# Altium PCB sustentationAvecPC.PcbDoc
Units mm, origin at the board's own origin, x right, y up, seen from the top; angles counter-clockwise.
Board outline 160.02 x 100.33 mm, 3 copper layers (Top Layer, Mid-Layer 1, Bottom Layer); 26 components, 21 nets, 95 pads, 0 vias.
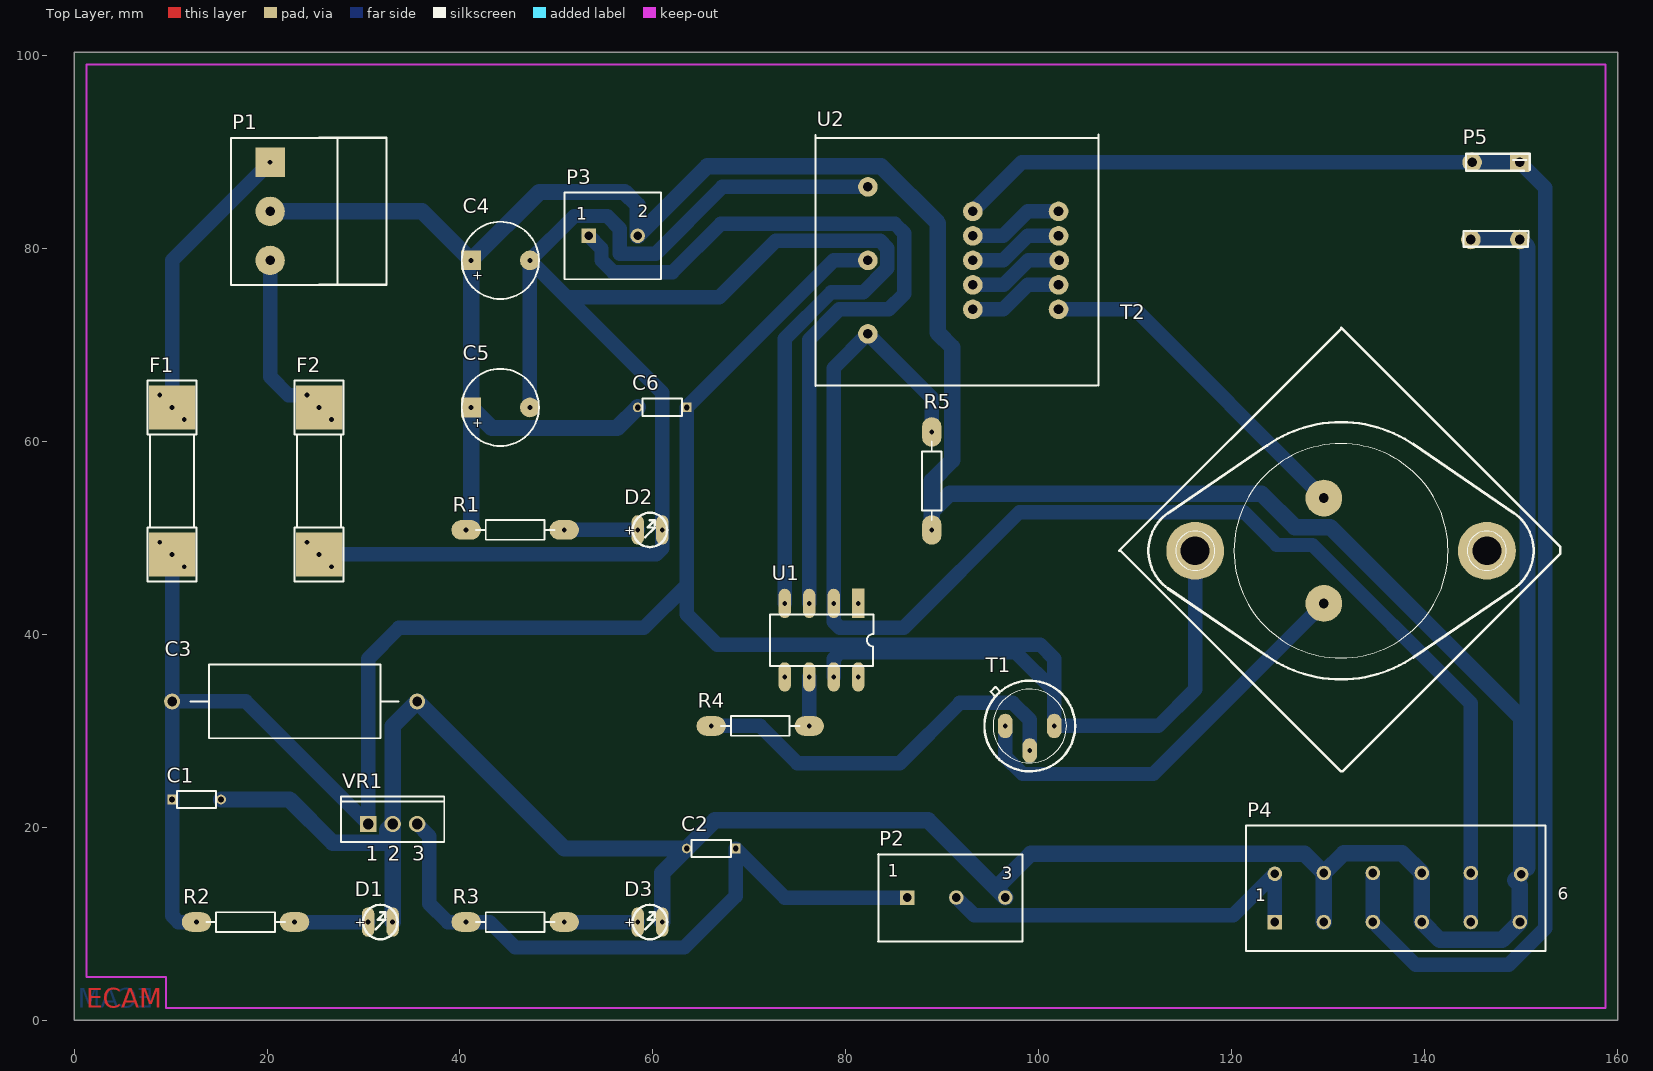
[diagram p0: Top Layer view]
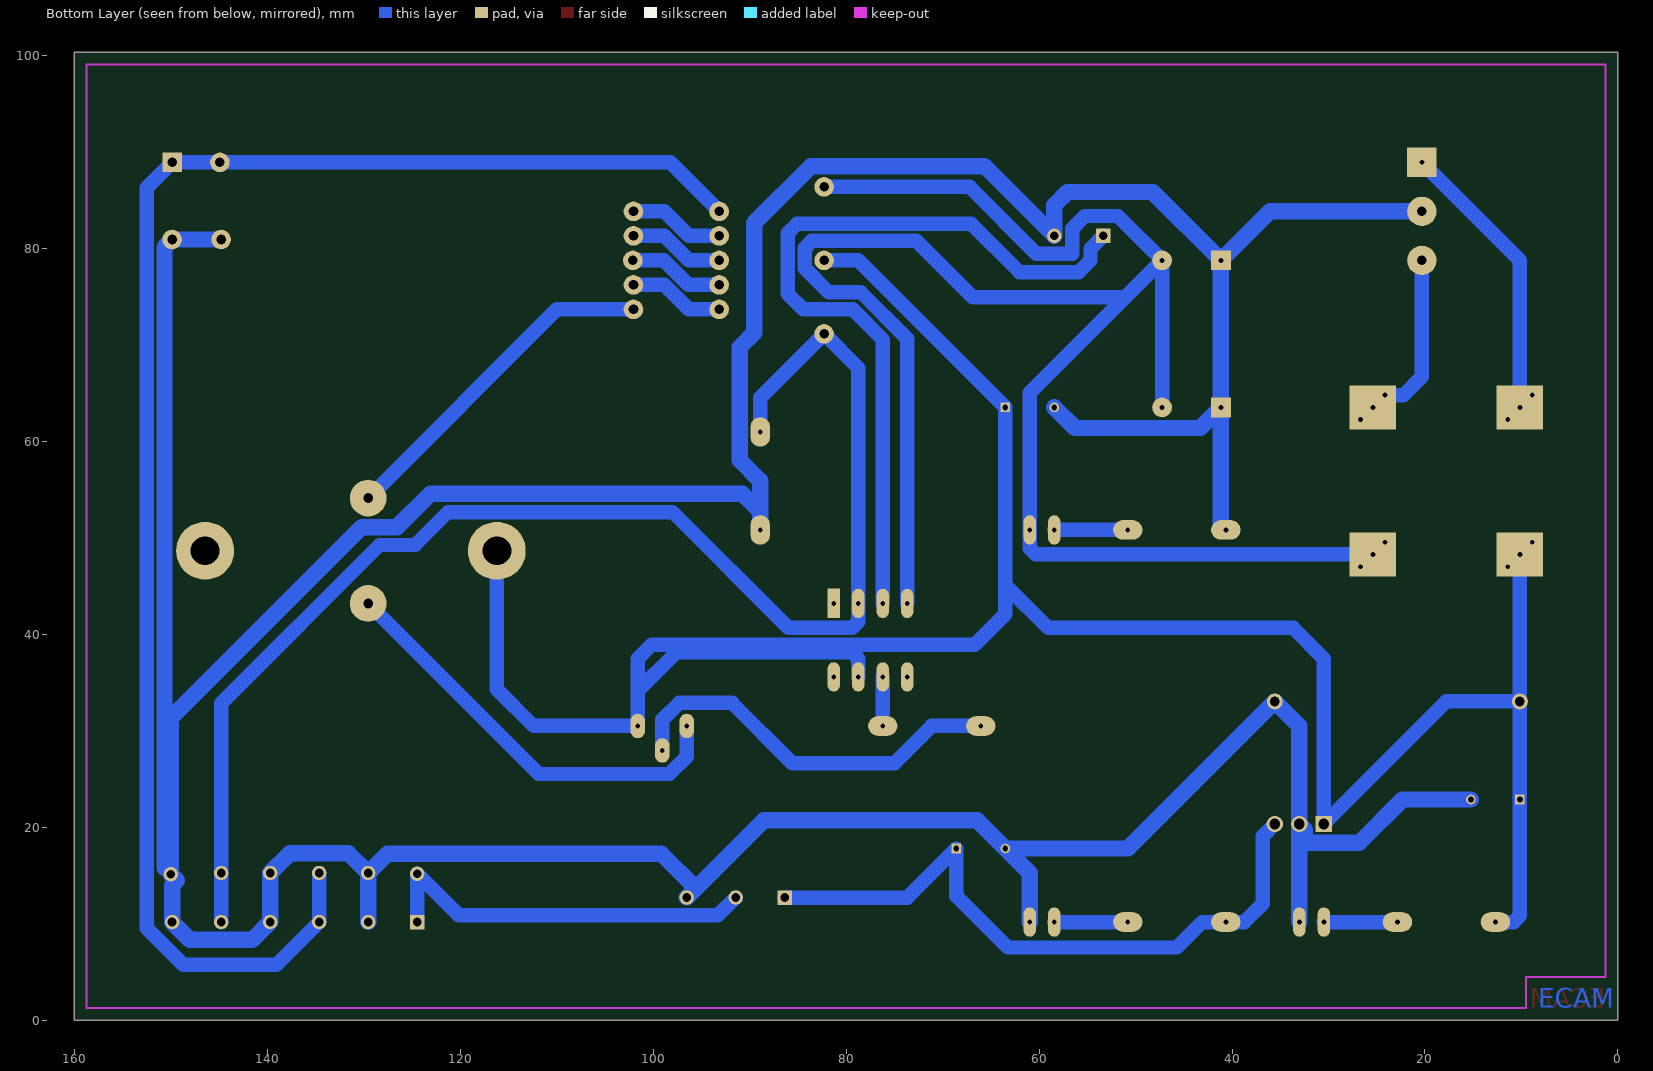
[diagram p1: Bottom Layer view, seen from below]
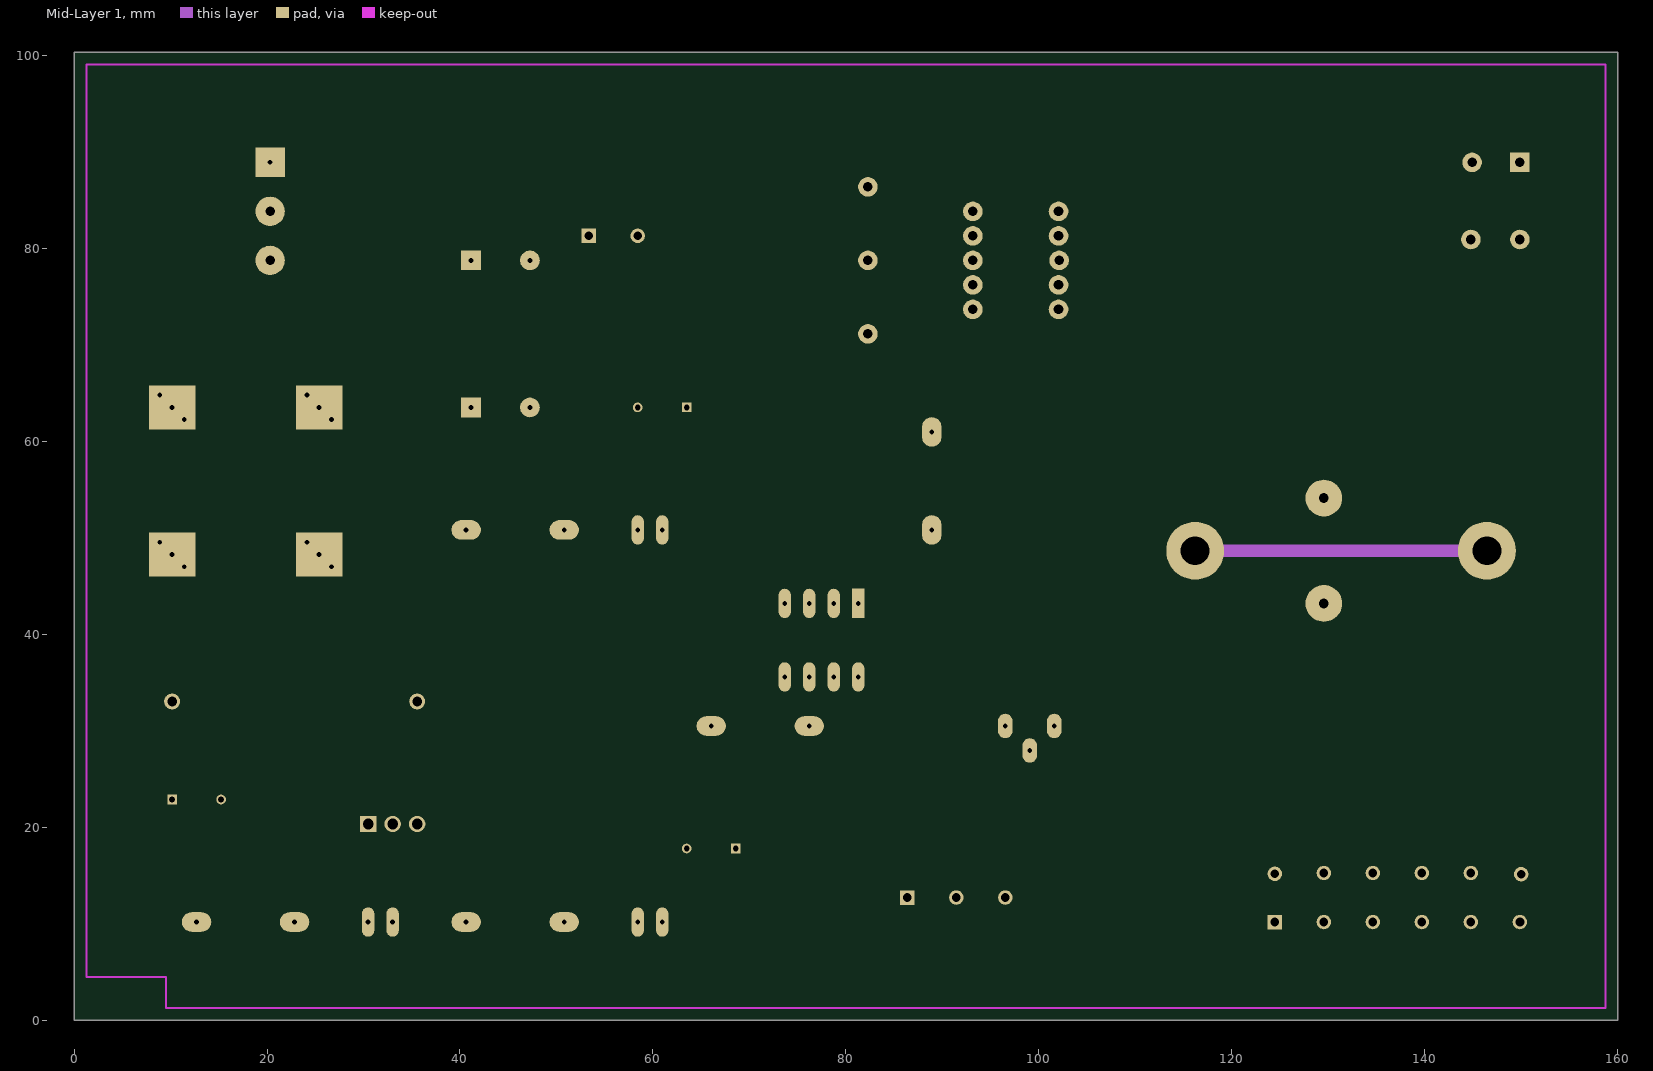
[diagram p2: Mid-Layer 1]

## Layer stack, top to bottom
Top Layer: signal copper 0.0356
Dielectric: core 0.32, FR-4, Dk 4.8
Mid-Layer 1: signal copper 0.0356
Dielectric: dielectric 0.32, FR-4, Dk 4.8
Bottom Layer: signal copper 0.0356

## Board outline
0,0 0,100.33 160.02,100.33 160.02,0

## Design rules (kind name [scope] priority, off if disabled: settings)
Clearance Clearance_1 [All] p1: gap=0.254
Clearance "Clearance T DIP" [(IsTrack) vs (IsPad AND(
HasFootprint('DIP*')))] p2: gap=0.305
Clearance "Clearance PT" [(isTrack) vs (isPad)] p3: gap=0.61
Clearance "Clearance TT" [(isTrack) vs (isTrack)] p4: gap=0.61
Clearance Clearance_plan [All] p5: gap=1
ComponentClearance [All] p1: gap=0.254 collisioncheckmode=0 verticalgap=0.254
HoleSize [All] p1: absolutevalues=TRUE maxlimit=0.55 minlimit=0.45 maxpercent=80.000 minpercent=20.000
PolygonConnect [All] p1: connectstyle=Relief reliefconductorwidth=0.254 reliefentries=4 polygonreliefangle="90 Angle"
RoutingCorners [All] p1: cornerstyle=45-Degree minsetback=2.54 maxsetback=25.4
RoutingLayers [All] p1: top layer_v5=FALSE mid layer 1_v5=FALSE bottom layer_v5=TRUE
RoutingVias "ECAM Vias" [All] p1: holewidth=0.5 width=2.032 viastyle="Through Hole" minholewidth=0.45 minwidth=1.524 maxholewidth=0.55 maxwidth=3.048
SolderMaskExpansion [All] p1: expansion=0.102
TestPointUsage [All] p1: valid=0 allowmultiple=FALSE
Testpoint [All] p1: side=15 testpointundercomponent=TRUE minsize=1.016 maxsize=2.54 preferedsize=1.524 minholesize=0 maxholesize=1.016 preferedholesize=0.813 testpointgrid=0.025 style=1023 order=0-112345678
Width Width_GND [InNet('GND')] p1: maxlimit=2 minlimit=1.2 preferedwidth=1.7
Width Width_VCC [InNet('VCC')] p2: maxlimit=25.4 minlimit=0.61 preferedwidth=1.016
Width [All] p3: maxlimit=1.8 minlimit=1 preferedwidth=1.5
14 further rules are at their usual default settings.

## Components (designator, comment, footprint, x,y, rotation, side; value= is the part's Value field where it differs from the comment)
C1 "Condensateur" Capa_100n 10.16,22.86 r0 top
C2 "Condensateur" Capa_100n 68.58,17.78 r180 top
C3 "Cond pol radial" AXIAL-1.0 22.86,33.02 r0 top
C4 "Cond pol radial" CAPPR_100u 43.18,78.74 r0 top
C5 "Cond pol  rad" CAPPR_100u 43.18,63.5 r0 top
C6 "Condensateur" Capa_100n 63.5,63.5 r180 top
D1 "LED" "Led 0.1" 30.48,10.16 r0 top
D2 "LED" "Led 0.1" 58.42,50.8 r0 top
D3 "LED" "Led 0.1" 58.42,10.16 r0 top
F1 "" FUSE-10 10.16,63.5 r270 top
F2 "" FUSE-10 25.4,63.5 r270 top
P1 "Alim +/-15V" CONVIS-3 20.32,88.9 r270 top
P2 "Hall sensor" "connecteur capteur Hall" 86.36,12.7 r0 top
P3 "Connecteur PC Sortie de Commande" "connecteur PC Sorties command" 53.34,81.28 r0 top
P4 "Connecteur PC Entrees" "connecteur PC Entrées" 124.46,10.16 r0 top
P5 "Sortie Electro-aimant" "connecteur 3A" 149.86,88.9 r270 top
R1 "Résistance" AXIAL-0.4 40.64,50.8 r0 top
R2 "Résistance" AXIAL-0.4 22.86,10.16 r180 top
R3 "Résistance" AXIAL-0.4 50.8,10.16 r180 top
R4 "Résistance" AXIAL-0.4 66.04,30.48 r0 top
R5 "Résistance" AXIAL-0.4 88.9,50.8 r90 top
T1 "NPN" TO-5 96.52,30.48 r180 top
T2 "NPN_Puissance" TO-3 129.54,43.18 r0 top
U1 "Op Amp" DIP8 81.28,43.18 r180 top
U2 "CapteurDeCourant" Sonde_Courant 91.44,78.74 r270 top
VR1 "7805" "TO-220 regulateur" 33.02,20.32 r0 top

## Footprints (in the part's own frame and the unit in brackets; to place one, negate y for a bottom-side part, rotate by r counter-clockwise, add the part's x,y. Pads: shape width x height; smd on the part's side, far side on the other; paste and mask are expansions set on the pad)
AXIAL-0.4 [mil]
  oval 120x80 hole 19.68: 1(0,0) 2(400,0)
  silkscreen extent 40,-40 360,40
AXIAL-1.0 [mm] "Adjustable Magnetic-Core Inductor; 2 Leads"
  round 1.65 hole 1: 1(-12.7,0) 2(12.7,0)
  silkscreen extent -10.79,-3.81 10.79,3.81
Capa_100n [mm] "Connector; Header; 2 Position"
  rect 1x1 hole 0.6: 1(0,0)
  round 1 hole 0.6: 2(5.08,0)
  silkscreen extent 0.5,-0.91 4.57,0.89
CAPPR_100u [mm]
  rect 2.048x2.048 hole 0.5: 1(-2.032,0)
  round 2.048 hole 0.5: 2(4.064,0)
  silkscreen extent -3,-4 5,4
"connecteur 3A" [mil] "Connector; Header; 2 Position"
  rect 80x80 hole 39.37: 1(0,0)
  round 80 hole 39.37: 1(0,-195) 2(314.96,0) 2(314.96,-200)
  silkscreen extent -35,-230 346,40
"connecteur capteur Hall" [mm] "Connector; Header; 3x1 Position"
  rect 1.5x1.5 hole 0.9: 1(0,0)
  round 1.5 hole 0.9: 2(5.08,0) 3(10.16,0)
  silkscreen extent -3.06,-4.55 11.94,4.5
"connecteur PC Entrées" [mm] "Connector; Header; 6x2 Position"
  rect 1.5x1.5 hole 0.9: 1(0,0)
  round 1.5 hole 0.9: 1(0,5) 2(5.08,0) 2(5.08,5.08) 3(10.16,0) 3(10.16,5.08) 4(15.24,0) 4(15.24,5.08) 5(20.32,0) 5(20.32,5.08) 6(25.4,0) 6(25.527,4.953)
  silkscreen extent -3,-3 28.07,10
"connecteur PC Sorties command" [mm] "Connector; Header; 2x1 Position"
  rect 1.5x1.5 hole 0.9: 1(0,0)
  round 1.5 hole 0.9: 2(5.08,0)
  silkscreen extent -2.5,-4.5 7.5,4.5
CONVIS-3 [mil]
  rect 120x120 hole 19.68: 1(0,0)
  round 120 hole 39.37: 2(200,0) 3(400,0)
  silkscreen extent -100,-160 500,475
DIP8 [mm]
  rect 1.27x3.048 hole 0.5: 1(0,0)
  oval 1.27x3.048 hole 0.5: 2(2.54,0) 3(5.08,0) 4(7.62,0) 5(7.62,7.62) 6(5.08,7.62) 7(2.54,7.62) 8(0,7.62)
  silkscreen extent -1.56,1.14 9.14,6.48
FUSE-10 [mil]
  rect 80x90 hole 19.68: 1(-50,-50) 1(50,50) 2(550,-50) 2(650,50)
  rect 180x190 hole 19.68: 1(0,0) 2(600,0)
  Mid-Layer 1 lines w50: 550,-50 600,0 650,50 ; -50,-50 0,0 50,50
  silkscreen extent -110,-100 710,100
"Led 0.1" [mm]
  oval 1.27x3.048 hole 0.5: 1(0,0) 2(2.54,0)
  silkscreen extent -0.51,-1.78 3.05,1.78
Sonde_Courant [mil] "Adjustable Magnetic-Core Inductor; 2 Leads"
  round 80 hole 39.37: 1(200,417.32) 2(100,417.32) 3(0,420) 4(-100,417.32) 5(-200,417.32) 6(-200,67.32) 7(-100,67.32) 8(0,67.32) 9(100,67.32) 10(200,67.32) 11(-300,-360.63) 12(0,-360.63) 13(300,-360.63)
  silkscreen extent -514,-575 512,580
TO-3 [mm]
  round 3.81 hole 1: 1(0,0) 2(0,10.922)
  round 6 hole 3: 3(-13.335,5.461) 3(16.891,5.461)
  Mid-Layer 1 lines w1.27: -13.335,5.461 16.891,5.461
  silkscreen extent -21.22,-17.4 24.51,28.6
TO-5 [mm]
  oval 1.524x2.54 hole 0.5: 1(0,0) 2(-2.54,2.54) 3(-5.08,0)
  silkscreen extent -7.24,-4.7 2.16,4.7
"TO-220 regulateur" [mm] "TO, Thru-Hole, Vertical, Heatsink Mounted; 3 In-Line Leads; Pitch 2.54 mm"
  rect 1.7x1.7 hole 1.1: 1(-2.54,0)
  round 1.7 hole 1.1: 2(0,0) 3(2.54,0)
  silkscreen extent -5.35,-1.85 5.35,2.85

## Part data
C3 C4: "Condensateur polatisé"
C5: library part "Cond pol radial", "Condensateur polatisé"
F1 F2: library part Fusible, "Fusible"
P1 P2: library part "connecteur 3", "Header, 3-Pin"
P3 P5: library part "Connecteur 2", "Connecteur"
P4: library part "Header 6", "Header, 6-Pin"
R1 R2 R3 R4 R5: "Résistance standard"
T1 T2: "NPN Bipolar Transistor"
U1: "FET Operational Amplifier"
VR1: library part "Volt Reg", "Voltage Regulator"

## Nets (pads, with @x,y where several pads share a name; then routed paths per layer and width w, separated by ;. In a path a pad name is that pad's centre, name@x,y a point inside that pad or via, vN(x,y) a via of type N, cw(c..) or ccw(c..) an arc to the next point about the centre after c; other vN are vias at no path point)
GND: C1.2 C2.2 C3.2 C4.1 C5.1 C6.2 D1.2 D3.2 P1.2 P2.3 P3.2 P4.2 P4.4 P4.6 P5.2 R1.1 R5.1 VR1.2 | length 524.2
  Bottom Layer w1.7: C1.2 22.327,22.86 26.822,18.364 32.436,18.364 32.436,19.736 VR1.2 ; P1.2 36.068,83.82 C4.1 ; D1.2 VR1.2 ; R1.1 41.148,50.8 C5.1 ; C6.2 56.286,61.366 43.282,61.366 C5.1 ; D3.2 60.96,15.24 C2.2 ; R5.1 88.9,52.705 ; P2.3 95.567,13.652 ; P4.2@129.54,10.16 P4.2@129.54,15.24 ; P5.2@144.78,80.9 149.86,80.9 150.647,80.113 150.647,15.773 P4.6@149.987,15.773 ; VR1.2 33.02,30.48 C3.2 50.8,17.78 C2.2 ; C5.1 C4.1 ; C4.1 48.235,85.827 57.048,85.827 58.42,84.455 P3.2 65.634,88.494 83.642,88.494 89.535,82.601 89.535,71.222 91.034,69.723 91.034,58.014 88.9,55.88 88.9,52.705 ; C2.2 66.421,20.701 88.519,20.701 95.567,13.652 ; 88.9,52.705 90.754,54.559 123.077,54.559 126.543,51.093 130.212,51.093 149.987,31.318 P4.6@149.987,15.773 ; 95.567,13.652 99.162,17.247 127.533,17.247 P4.2@129.54,15.24 ; P4.2@129.54,15.24 131.597,17.297 137.643,17.297 139.7,15.24 139.7,10.16 141.554,8.306 148.006,8.306 149.86,10.16 149.86,13.97 149.352,14.478 149.987,15.113 P4.6@149.987,15.773
NetC1_1: C1.1 C3.1 C6.1 F1.2 R2.2 T1.3 T2.3 U1.7 U2.12 VR1.1 | length 269.9
  Bottom Layer w1.5: F1.2@10.16,48.26 10.16,46.99 C3.1 ; R2.2 10.795,10.16 10.16,10.795 C1.1 C3.1 ; U1.7 78.74,37.465 79.375,38.1 97.612,38.1 101.6,34.112 ; U2.12 78.74,78.74 C6.1 63.5,45.085 ; T2.3@116.205,48.641 116.205,34.29 112.395,30.48 T1.3 101.6,34.112 ; C3.1 17.78,33.02 VR1.1 30.48,37.465 33.655,40.64 59.055,40.64 63.5,45.085 ; 63.5,45.085 63.5,42.073 66.675,38.898 100.167,38.898 101.6,37.465 101.6,34.112
NetC2_1: C2.1 P2.1 R3.2 VR1.3 | length 69.4
  Bottom Layer w1.5: VR1.3 36.83,19.05 36.83,12.065 38.735,10.16 R3.2 43.078,10.16 45.72,7.518 63.246,7.518 68.58,12.852 C2.1 73.66,12.7 P2.1
NetC4_2: C4.2 C5.2 D2.2 F2.2 U1.4 U2.11 | length 208.7
  Bottom Layer w1.5: F2.2@25.4,48.26 26.67,48.26 60.325,48.26 60.96,48.895 D2.2 60.96,65.024 51.054,74.93 ; C5.2 C4.2 ; U1.4 73.66,70.612 78.461,75.413 81.809,75.413 84.3,77.903 84.3,80.01 83.55,80.76 72.719,80.76 66.889,74.93 51.054,74.93 ; U2.11 67.208,86.36 60.274,79.426 56.566,79.426 56.566,82.017 55.245,83.337 51.841,83.337 C4.2 ; C4.2 51.054,74.93
NetD1_1: D1.1 R2.1 | length 7.6
  Bottom Layer w1.5: R2.1 D1.1
NetD2_1: D2.1 R1.2 | length 7.6
  Bottom Layer w1.5: R1.2 D2.1
NetD3_1: D3.1 R3.1 | length 7.6
  Bottom Layer w1.5: R3.1 D3.1
NetF1_1: F1.1 P1.1 | length 29.6
  Bottom Layer w1.5: F1.1@10.16,63.5 10.16,64.77 10.16,78.74 P1.1
NetF2_1: F2.1 P1.3 | length 16.7
  Bottom Layer w1.5: P1.3 20.32,66.675 22.225,64.77 F2.1@24.13,64.77
NetP2_2: P2.2 P4.1 | length 40.6
  Bottom Layer w1.5: P2.2 93.294,10.846 120.146,10.846 124.46,15.16 P4.1@124.46,10.16
NetP3_1: P3.1 U1.3 | length 82.9
  Bottom Layer w1.5: P3.1 54.669,79.951 54.669,78.74 55.88,77.529 62.028,77.529 67.013,82.514 85.09,82.514 86.054,81.55 86.054,75.258 84.455,73.659 79.323,73.659 76.2,70.536 U1.3
NetP4_3: P4.3 P5.1 U2.6 | length 165.6
  Bottom Layer w1.5: U2.6 98.23,88.9 144.907,88.9 149.86,88.9 152.502,86.258 152.502,9.525 148.717,5.74 139.04,5.74 134.62,10.16 P4.3@134.62,15.24
NetP4_5: P4.5 R5.2 U1.2 U2.13 | length 146.3
  Bottom Layer w1.5: R5.2 88.9,64.5 U2.13 78.74,67.58 U1.2 78.74,41.287 79.375,40.652 85.991,40.652 97.993,52.654 121.262,52.654 124.677,49.239 128.358,49.239 144.78,32.817 144.78,15.24 P4.5@144.78,10.16
NetR4_1: R4.1 T1.2 | length 41.1
  Bottom Layer w1.5: R4.1 71.12,30.48 74.981,26.619 85.573,26.619 91.821,32.868 97.307,32.868 99.06,31.115 T1.2
NetR4_2: R4.2 U1.6 | length 5.1
  Bottom Layer w1.5: R4.2 U1.6
NetT1_1: T1.1 T2.1 | length 44.3
  Bottom Layer w1.5: T1.1 96.52,27.305 98.323,25.502 111.862,25.502 T2.1
NetT2_2: T2.2 U2.1 | length 35.6
  Bottom Layer w1.5: U2.1 109.982,73.66 T2.2
NetU2_2: U2.2 U2.10 | length 9.9
  Bottom Layer w1.5: U2.10 96.317,73.66 98.857,76.2 U2.2
NetU2_3: U2.3 U2.9 | length 10
  Bottom Layer w1.5: U2.9 96.342,76.2 98.882,78.74 U2.3
NetU2_4: U2.4 U2.8 | length 9.9
  Bottom Layer w1.5: U2.8 96.317,78.74 98.857,81.28 U2.4
NetU2_5: U2.5 U2.7 | length 9.9
  Bottom Layer w1.5: U2.7 96.317,81.28 98.857,83.82 U2.5
pads on no net: U1.1 U1.5 U1.8

## Keep-outs
Keep-Out Layer:
  lines w0.203: 1.27,4.445 9.525,4.445 9.525,1.27 158.75,1.27 158.75,99.06 1.27,99.06 1.27,4.445

## Other copper
Top Layer:
  text "ECAM" at 1.27,1.27 h2
  text ".GTL" at 197.206,-38.811 h2.29
Bottom Layer:
  text "ECAM" at 8.255,1.27 h2
  text ".GBL" at 197.206,-38.811 h2.29
Multi-Layer:

## Silkscreen, mask and mechanical layers (free items; w line width, h text height)
Top Overlay:
  text ".GTO" at 197.206,-38.811 h2.29
Top Paste:
  text ".GTP" at 197.206,-38.811 h2.29
Bottom Paste:
  text ".GBP" at 197.206,-38.811 h2.29
Top Solder:
  text ".GTS" at 197.206,-38.811 h2.29
Bottom Solder:
  text ".GBS" at 197.206,-38.811 h2.29
Mechanical 1:
  the board outline again, w0.2
Mechanical 16:
  circle w0.1: c169.418,-38.481 r1.4
  lines w0.127: -55.245,-5.715 -50.165,-5.715 ; -55.245,42.545 -50.165,42.545 ; -55.245,90.805 -50.165,90.805 ; 7.747,-53.975 7.747,-48.895 ; 7.747,133.985 7.747,139.065 ; 80.772,-53.975 80.772,-48.895 ; 80.772,133.985 80.772,139.065 ; 96.901,-41.275 211.201,-41.275 ; 96.901,-33.655 211.201,-33.655 ; 96.901,-26.035 135.001,-26.035 ; 135.001,-48.895 135.001,-33.655 135.001,-18.415 ; 153.797,-53.975 153.797,-48.895 ; 153.797,133.985 153.797,139.065 ; 188.341,-48.895 188.341,-33.655 ; 211.201,90.551 216.281,90.551 ; 96.901,-48.895 61.341,-48.895 61.341,-18.415 96.901,-18.415 ; 96.901,-48.895 211.201,-48.895 ; 96.901,-48.895 96.901,-18.415 ; 96.901,-18.415 135.001,-18.415 ; 135.001,-18.415 211.201,-18.415 211.201,-48.895 ; 211.201,-48.895 211.201,133.985 -50.165,133.985 -50.165,-48.895 211.201,-48.895 ; -55.245,-53.975 -55.245,139.065 216.281,139.065 216.281,-53.975 -55.245,-53.975
  text "1" at -29.032,135.636 h1.78
  text "2" at 43.612,135.636 h1.78
  text "3" at 116.764,135.636 h1.78
  text "4" at 189.662,135.636 h1.78
  text "A" at -53.34,112.624 h1.78
  text "A" at 213.106,112.37 h1.78
  text "B" at -53.34,64.567 h1.78
  text "C" at -53.34,16.053 h1.78
  text "Concepteur du circuit :" at 98.171,-20.955 h1.14
  text "TITRE :" at 136.271,-20.955 h1.14
  text "ERM" at 107.696,-24.765 h2.03
  text "Sustentation pilote par PC" at 142.875,-27.813 h2.54
  text "Concepteur du PCB :" at 98.171,-28.448 h1.14
  text "ERM" at 67.31,-28.829 h6.1
  text "D" at -53.34,-31.953 h1.78
  text "D" at 213.106,-32.207 h1.78
  text "ERM" at 107.569,-32.512 h2.03
  text "Av. Renaiss 30" at 69.088,-35.687 h1.52
  text "Date :" at 98.171,-36.195 h1.14
  text "PART NO.:" at 136.271,-36.195 h1.14
  text "Layer :" at 189.611,-36.195 h1.14
  text ".Print_Date" at 108.077,-37.084 h1.78
  text "1" at 136.398,-39.243 h1.52
  text "C" at 168.783,-39.243 h1.52
  text ".Print_Time" at 108.204,-40.386 h1.78
  text "1000 Bruxelles" at 69.088,-41.275 h1.52
  text "Nom du fichier :" at 98.171,-43.815 h1.14
  text "DWG NO:" at 136.271,-43.815 h1.14
  text ".Print_Scale" at 193.675,-45.847 h1.02
  text ".Printout_Name" at 140.081,-46.736 h1.52
  text ".Pcb_File_Name_No_Path" at 99.441,-46.863 h1.78
  text "1" at -29.032,-52.324 h1.78
  text "2" at 43.612,-52.324 h1.78
  text "3" at 116.764,-52.324 h1.78
  text "4" at 189.662,-52.324 h1.78

## Text inside footprints (layer, text, board x,y; h text height)
C4: Top Overlay "+" at 41.275,76.708 h1
C5: Top Overlay "+" at 41.275,61.468 h1
D1: Top Overlay "+" at 29.083,9.652 h1
D2: Top Overlay "+" at 57.023,50.292 h1
D3: Top Overlay "+" at 57.023,9.652 h1
P2: Top Overlay "1" at 84.328,14.859 h1.27; Top Overlay "3" at 96.139,14.605 h1.27
P3: Top Overlay "2" at 58.42,83.185 h1.27; Top Overlay "1" at 52.07,82.931 h1.27
P4: Top Overlay "6" at 153.797,12.446 h1.27; Top Overlay "1" at 122.428,12.319 h1.27
VR1: Top Overlay "3" at 35.06,16.495 h1.5; Top Overlay "2" at 32.52,16.495 h1.5; Top Overlay "1" at 30.23,16.495 h1.5